# EAGLE board x50_ecu (EAGLE 9.2.2)
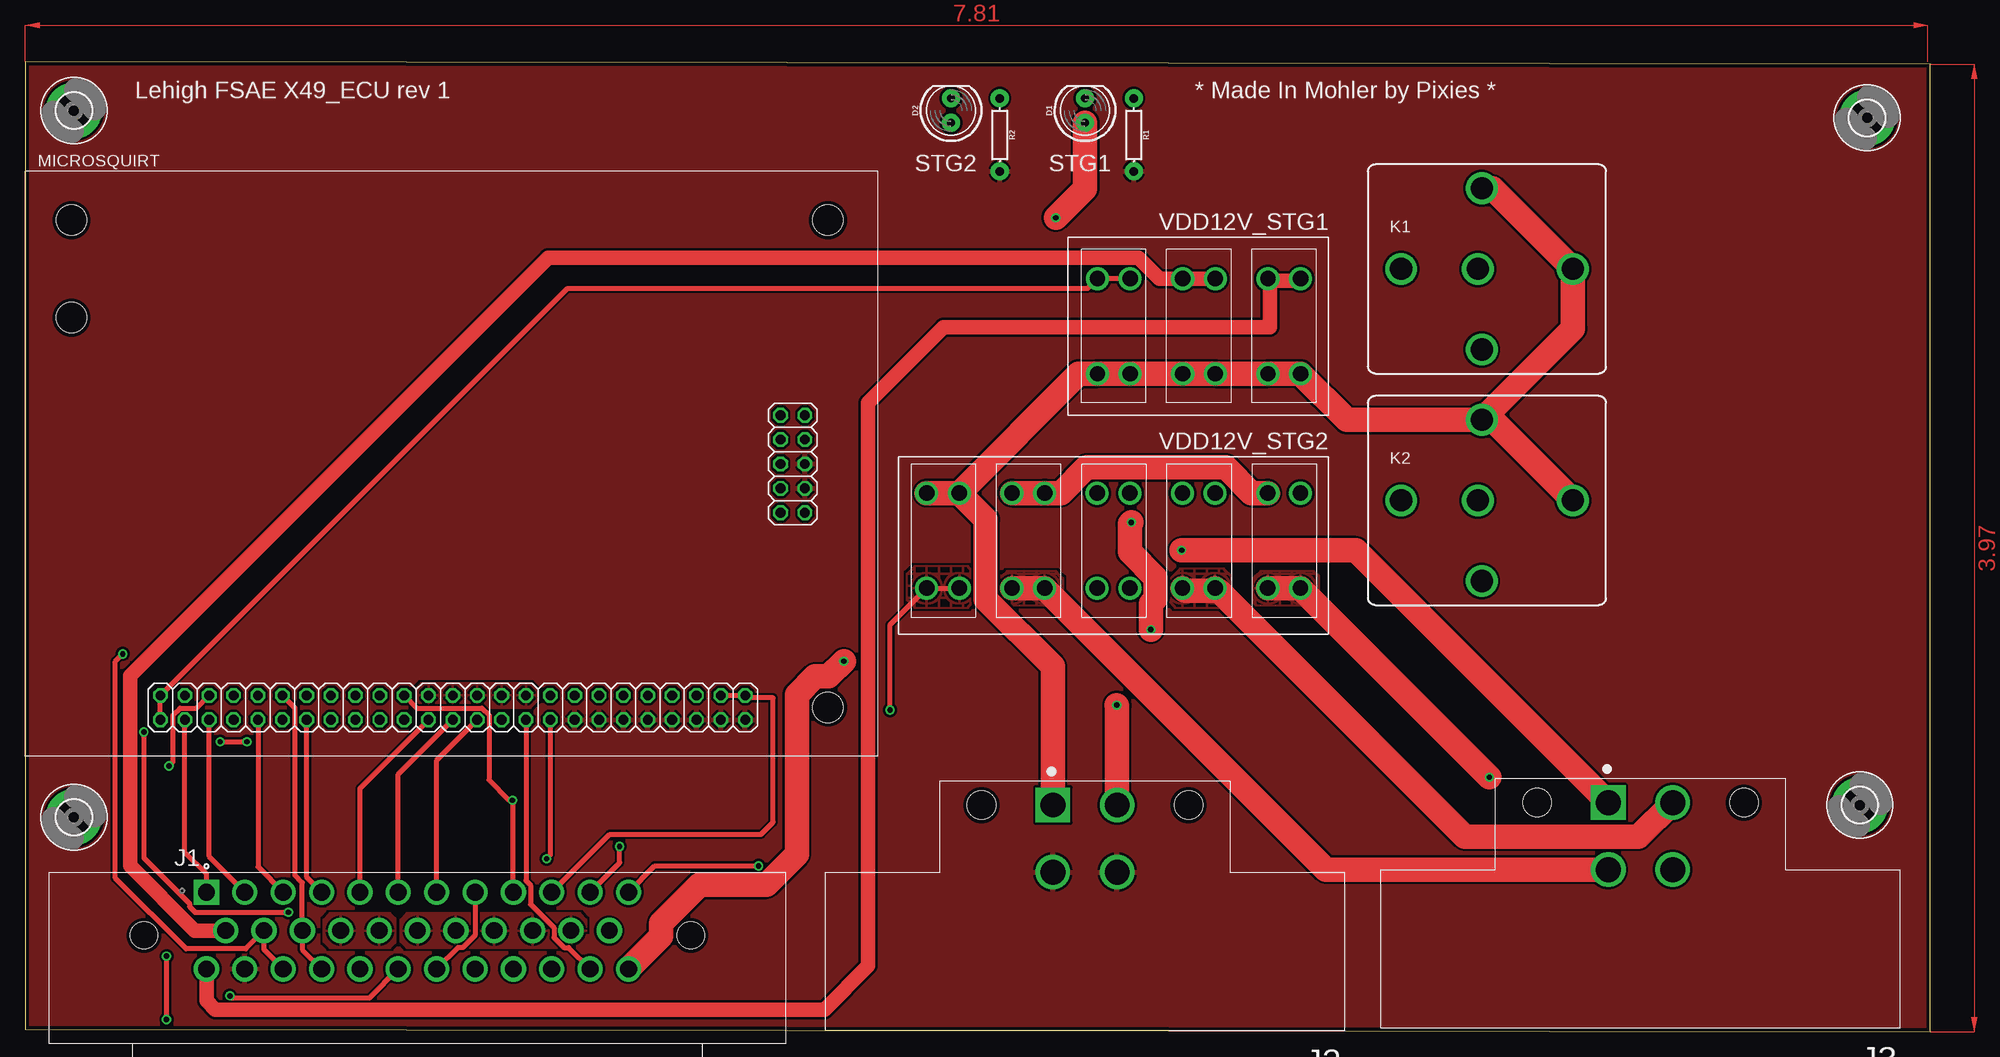
[diagram p0: board, top side]
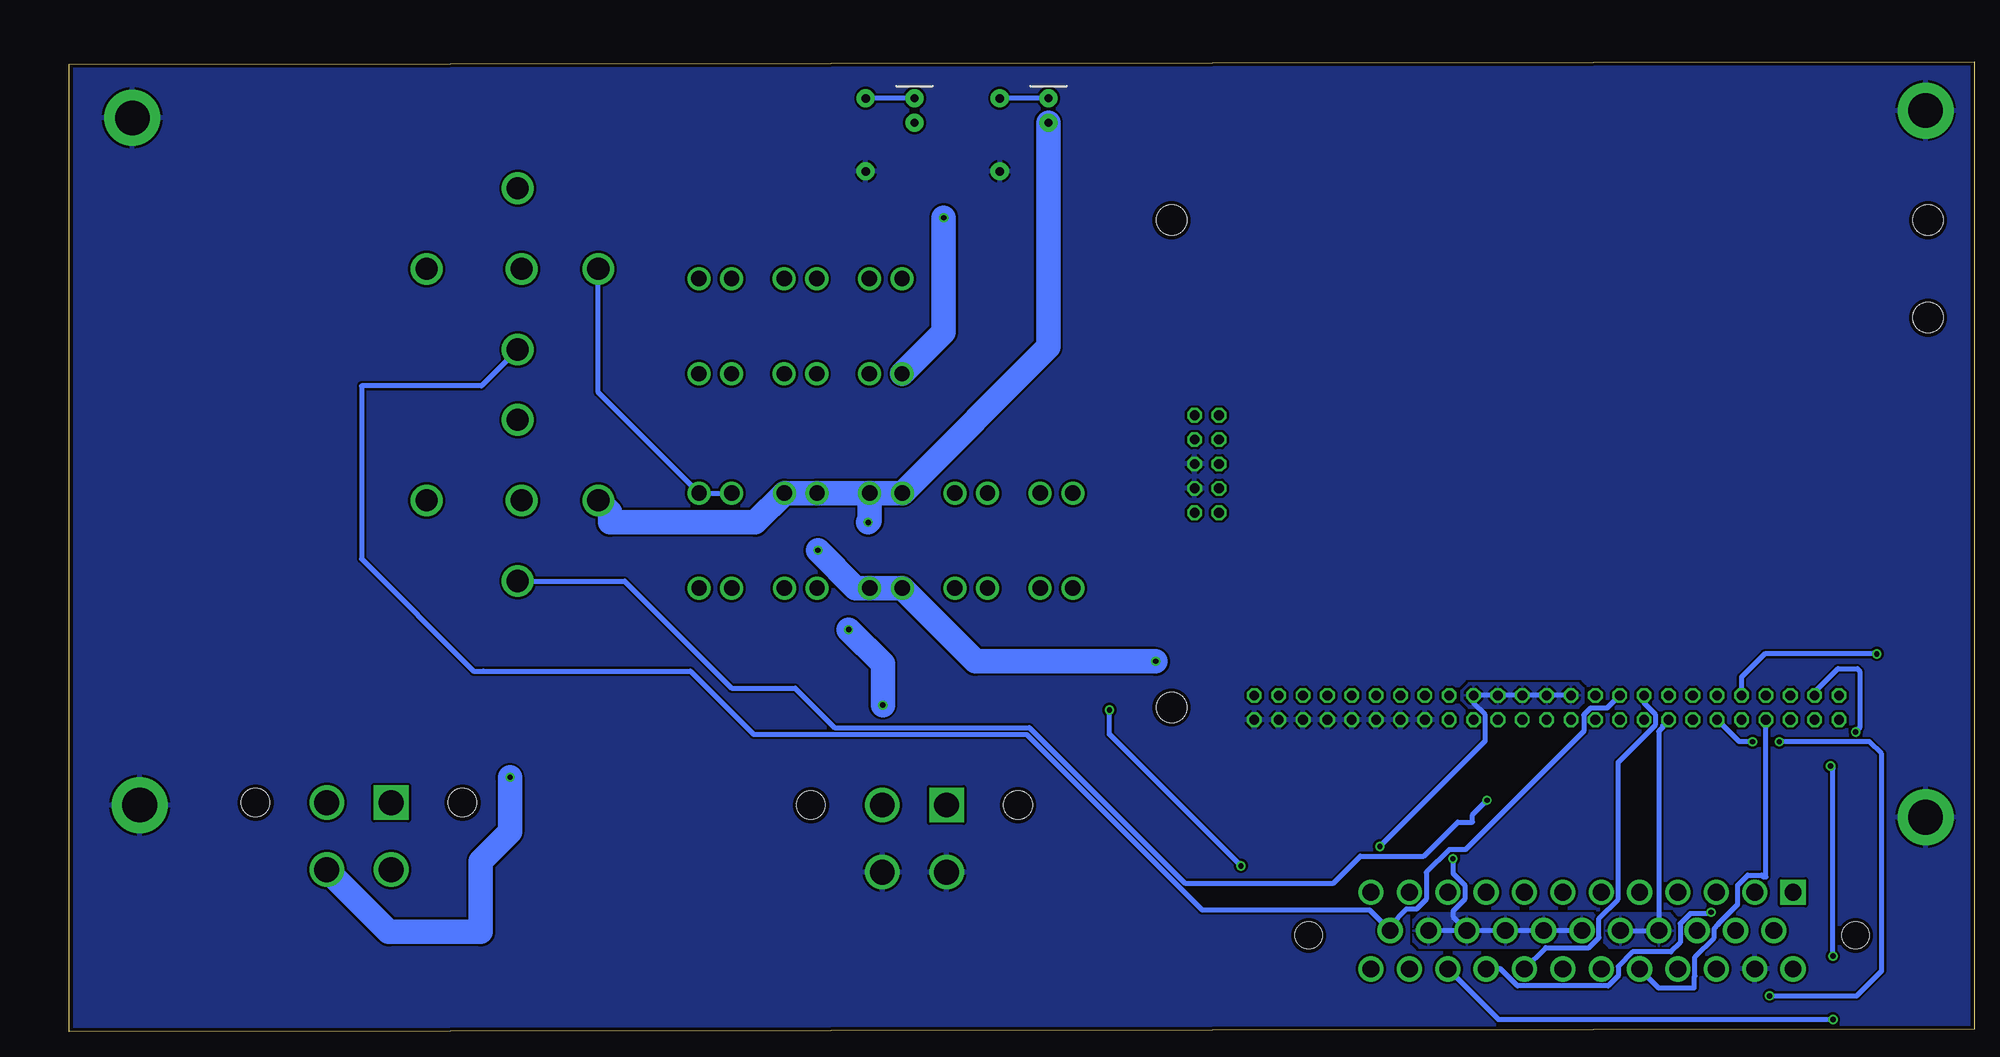
[diagram p1: board, bottom side, seen from below]

Size 198.63 x 101.09 mm. Coordinates in mm from the lower left corner, seen from the top.
Outline: 0,0.25 198.63,0 198.63,100.84 0,101.09 0,0.25
Copper layers (1*16): Top 0.035559375mm / dielectric 1.501140625mm / Bottom 0.035559375mm
Design rules "typical_4pcb": minimum track width 10mil, minimum drill 15mil, track to track 6mil, track to pad 6mil, pad to pad 6mil, via to via 6mil, smd to smd 6mil, copper to edge 15mil, drill to drill 8mil, minimum pad ring 10mil, minimum via ring 8mil, stop-mask expansion 4mil, vias tented up to drill 0mil, thermal gap 10mil
Net classes: 0 default: clearance 0.205 mm; 1 PWR: width 0.508 mm, drill 0.55 mm, clearance 0.205 mm to class 0, clearance 0.205 mm

## Footprints (pad centres in the part's own frame; a part is rotated, then mirrored left to right if it is on the bottom)
LED_5MM = drill 0.813 pad 1.88: A -1.27,0; K 1.27,0
3,6-PAD = drill 3.6 pad 5.842: B3,6 0,0
TE_1-776163-4 = drill 1.75 square: 1 -22,4 | drill 1.75: 2 -18,4; 3 -14,4; 4 -10,4; 5 -6,4; 6 -2,4; 7 2,4; 8 6,4; 9 10,4; 10 14,4; 11 18,4; 12 22,4; 13 -20,0; 14 -16,0; 15 -12,0; 16 -8,0; 17 -4,0; 18 0,0; 19 4,0; 20 8,0; 21 12,0; 22 16,0; 23 20,0; 24 -22,-4; 25 -18,-4; 26 -14,-4; 27 -10,-4; 28 -6,-4; 29 -2,-4; 30 2,-4; 31 6,-4; 32 10,-4; 33 14,-4; 34 18,-4; 35 22,-4 | hole 2.85: -28.5,-0.5; 28.5,-0.5
TE_DTP13-4P = drill 2.59 square: 1 3.355,0 | drill 2.59: 2 -3.355,0; 3 -3.355,6.99; 4 3.355,6.99 | hole 2.99: -10.795,0; 10.795,0
CB1 = drill 2.3: 30 8.95,0; 85 -0.55,-8.4; 86 -0.55,8.4; 87 -8.95,0; 87A -0.95,0
MICROSQUIRT_MODULE_V2.2M = drill 1.016 octagon: 5V_VREF_OUT 3.807,57.017; +12V_1 3.81,74.803; +12V_2 6.347,74.797; ACCEL_LED_OUT 3.807,67.177; ALT_CAM 33.009,10.152; ALT_INJ1 27.929,10.152; ALT_INJ2 30.469,10.152; BOOTLOADER 6.347,67.177; CANH 6.347,64.637; CANL 6.347,62.097; CLT_IN 3.807,69.717; FIDLE_OUT 6.347,51.937; FLEX 6.347,54.477; FUEL_PUMP_OUT 6.347,49.397; GND1_1 3.807,31.617; GND1_2 3.807,29.077; GND1_3 3.807,26.537; GND1_4 3.807,23.997; GND1_5 3.807,21.457; GND1_6 3.807,18.917; GND1_7 3.807,16.377; GND1_8 3.807,13.837; GND2_1 27.929,7.612; GND2_2 30.469,7.612; IAC_ENBL 35.549,10.152; IGN1_OUT_1 6.347,16.377; IGN1_OUT_2 6.347,13.837; IGN2_OUT_1 6.347,21.457; IGN2_OUT_2 6.347,18.917; INJ1_OUT_1 6.347,46.857; INJ1_OUT_2 6.347,44.317; INJ1_OUT_3 6.347,41.777; INJ1_OUT_4 6.347,39.237; INJ1_OUT_5 6.347,36.697; INJ2_OUT_1 6.347,34.157; INJ2_OUT_2 6.347,31.617; INJ2_OUT_3 6.347,29.077; INJ2_OUT_4 6.347,26.537; INJ2_OUT_5 6.347,23.997; MAP_IN 3.807,72.257; MAT_IN 3.807,64.637; O2_IN 3.807,41.777; OPTO_IN+ 3.807,51.937; OPTO_IN- 3.807,49.397; PA0 25.389,7.612; PE1 25.389,10.152; PT6 35.549,7.612; PT7 33.009,7.612; SENSOR_GND 3.807,34.157; SERIAL_GND 3.807,36.697; SERIAL_RX 6.347,72.257; SERIAL_TX 6.347,69.717; SPARE_ADC_1 3.807,54.477; SPARE_ADC_2 6.347,57.017; TACH_OUT 3.807,39.237; TPS_IN 3.807,59.557; VR1,2_GND 3.807,44.317; VR_IN1+ 3.807,46.857; VR_IN2+ 6.347,59.557; WARMLED_OUT 3.807,62.097 | hole 3.175: 5.08,5.207; 55.88,5.207; 45.72,84.074; 55.88,84.074
AXIAL-0.3 = drill 0.9 pad 1.88: P$1 -3.81,0; P$2 3.81,0
3568 = drill 1.6: L_1 0,0; L_2 0,3.404; R_1 9.906,0; R_2 9.906,3.404

## Placement (x,y rotation side)
D1  560  [LED_5MM]  110.49,96.01 90 top
D2  560  [LED_5MM]  96.52,96.01 90 top
H1  MOUNT-PAD-ROUND3.6  [3,6-PAD]  5.08,96.01 0 top
H2  MOUNT-PAD-ROUND3.6  [3,6-PAD]  192.02,95.25 0 top
H3  MOUNT-PAD-ROUND3.6  [3,6-PAD]  5.08,22.35 0 top
H4  MOUNT-PAD-ROUND3.6  [3,6-PAD]  191.26,23.62 0 top
J1  1-776163-4  [TE_1-776163-4]  40.89,10.54 0 top
J2  DTP13-4P  [TE_DTP13-4P]  110.49,23.62 180 top
J3  DTP13-4P  [TE_DTP13-4P]  168.4,23.88 180 top
K1  CB1-P-12V  [CB1]  152.4,79.5 0 top
K2  CB1-P-12V  [CB1]  152.4,55.37 0 top
MICROSQUIRT  MICROSQUIRT_MODULE_V2.2M  [MICROSQUIRT_MODULE_V2.2M]  88.9,28.7 90 top
R1  [AXIAL-0.3]  115.57,93.47 270 top
R2  [AXIAL-0.3]  101.6,93.47 270 top
U$2  3568  [3568]  132.97,68.58 90 top
U$3  3568  [3568]  124.08,68.58 90 top
U$4  3568  [3568]  115.19,68.58 90 top
U$5  3568  [3568]  93.98,56.13 270 top
U$6  3568  [3568]  120.65,56.13 270 top
U$7  3568  [3568]  111.76,56.13 270 top
U$8  3568  [3568]  102.87,56.13 270 top
U$9  3568  [3568]  129.54,56.13 270 top

## Library data of the parts
D1 D2 = SparkFun-LED
H1-H4 = holes
J1 = te_connectivity; COMPLIANCE: Lead free/RoHS compliant; CURRENT_RATING: Varies by Wire gauge; DATASHEET: http://www.te.com/commerce/DocumentDelivery/DDEController?Action=srchrtrv&DocNm=776163&DocType=Customer+Drawing&DocLang=English; FOOTPRINT: TE_1-776163-4; LATEST_REV_DATE: 09, March 2016; LIBRARY_REF: 1-776163-4.lbr; MANUFACTURER: TE Connectivity; PACKAGE: Panel Mount, Through Hole, Right angled; PART_DESCRIPTION: CONN HEADER 35POS R/A GOLD GRAY; PART_REV: J8; PITCH: 4mm; POS: 35; SPICEPREFIX: X; STANDARD: Manufacturer Recommendations; TE_PN: 1-776163-4; VOLTAGE_RATING: 250VAC
J2 J3 = te_connectivity; AVAILABILITY: In stock; DESCRIPTION: Dtp Recp 4#12 Pin 90 Deg; MF: TE Connectivity; MPN: DTP13-4P; PARTREV: B1; STANDARD: Manufacturer recommendation
K1 K2 = relay; MF: AROMAT/ MATSUSHITA; MPN: CB1-P-12V; OC_FARNELL: unknown; OC_NEWARK: 52F9201
MICROSQUIRT = microsquirt
R1 R2 = SparkFun-Resistors
U$2-U$9 = keystone_electronics

## Nets
ACCEL_LED: J1.28 MICROSQUIRT.ACCEL_LED_OUT
CAN_H: J1.14 J1.26 MICROSQUIRT.CANH
CAN_L: J1.15 J1.27 MICROSQUIRT.CANL
CLT_IN: J1.2 MICROSQUIRT.CLT_IN
FAN_EN_OUT: J1.23 K1.85 MICROSQUIRT.FIDLE_OUT
FLEX: J1.31 MICROSQUIRT.FLEX
GND: H1.B3,6 H2.B3,6 H3.B3,6 H4.B3,6 J1.25 J2.3 J2.4 MICROSQUIRT.GND1_1 MICROSQUIRT.GND1_2 MICROSQUIRT.GND1_3 MICROSQUIRT.GND1_4 MICROSQUIRT.GND1_5 MICROSQUIRT.GND1_6 MICROSQUIRT.GND1_7 MICROSQUIRT.GND1_8 MICROSQUIRT.GND2_1 MICROSQUIRT.GND2_2 R1.P$2 R2.P$2
IGN1_OUT: J1.10 MICROSQUIRT.IGN1_OUT_1 MICROSQUIRT.IGN1_OUT_2
INJ1_OUT: J1.11 MICROSQUIRT.INJ1_OUT_1 MICROSQUIRT.INJ1_OUT_2 MICROSQUIRT.INJ1_OUT_3 MICROSQUIRT.INJ1_OUT_4 MICROSQUIRT.INJ1_OUT_5
MAP_IN: J1.1 MICROSQUIRT.MAP_IN
MAT_IN: J1.3 MICROSQUIRT.MAT_IN
N$1: D1.K R1.P$1
N$2: D2.K R2.P$1
NEUTRAL_IN: J1.8 J1.30
O2_IN: J1.7 MICROSQUIRT.O2_IN
SENSOR_GND: J1.18 J1.19 J1.20 J1.21 J1.22 MICROSQUIRT.SENSOR_GND
SERIAL_GND: J1.34 MICROSQUIRT.SERIAL_GND
SERIAL_RX: J1.32 MICROSQUIRT.SERIAL_RX
SERIAL_TX: J1.33 MICROSQUIRT.SERIAL_TX
STG2_EN_OUT: J1.9 K2.85 MICROSQUIRT.FUEL_PUMP_OUT
TPS_IN: J1.4 MICROSQUIRT.TPS_IN
VDD5V: J1.16 J1.17 MICROSQUIRT.5V_VREF_OUT
VDD12V_BRAKE_TRANSP [PWR]: J1.13 U$3.R_1 U$3.R_2
VDD12V_DASH [PWR]: J1.24 U$2.R_1 U$2.R_2
VDD12V_ECU: MICROSQUIRT.+12V_1 MICROSQUIRT.+12V_2 U$4.R_1 U$4.R_2
VDD12V_FAN [PWR]: K1.87 U$8.L_1 U$8.L_2 U$9.L_1 U$9.L_2
VDD12V_FAN_L: J3.4 U$8.R_1 U$8.R_2
VDD12V_FAN_R: J3.3 U$9.R_1 U$9.R_2
VDD12V_FUEL_PUMP [PWR]: J3.2 U$6.R_1 U$6.R_2
VDD12V_IGN_INJ [PWR]: J1.35 J3.1 U$7.R_1 U$7.R_2
VDD12V_O2 [PWR]: J1.12 U$5.R_1 U$5.R_2
VDD12V_STG1 [PWR]: D1.A J2.1 K1.30 K1.86 K2.30 K2.86 U$2.L_1 U$2.L_2 U$3.L_1 U$3.L_2 U$4.L_1 U$4.L_2 U$5.L_1 U$5.L_2
VDD12V_STG2 [PWR]: D2.A J2.2 K2.87 U$6.L_1 U$6.L_2 U$7.L_1 U$7.L_2
VR+: J1.5 MICROSQUIRT.VR_IN1+
VR-: J1.6 MICROSQUIRT.VR1,2_GND
WARM_LED: J1.29 MICROSQUIRT.WARMLED_OUT

## Tracks (layer width: path | path; a pad name or v marks a point on that pad's centre or on a via)
ACCEL_LED
  Bottom 0.508: J1.28 32.92,4.57 29.21,4.57 29.21,5.72 29.12,5.81 29.12,7.81 27.12,9.81 27.12,10.72 26.67,11.18 26.67,11.27 24.67,13.27 24.67,15.27 23.63,16.31 22.16,16.31 21.97,16.12 21.72,16.12 MICROSQUIRT.ACCEL_LED_OUT
CAN_H  (via drill 0.55)
  Top 0.508: v10.16,39.37 9.4,38.61 9.4,16 16.76,8.64 22.99,8.64 J1.14 24.89,8.54 J1.26
  Bottom 0.508: v10.16,39.37 21.84,39.37 24.26,36.95 MICROSQUIRT.CANH
CAN_L
  Top 0.508: J1.27 28.89,8.54 J1.15 28.89,15.53 28.12,16.3 28.12,33.73 MICROSQUIRT.CANL
CLT_IN
  Top 0.508: J1.2 19.18,18.25 MICROSQUIRT.CLT_IN
FAN_EN_OUT
  Bottom 0.508: MICROSQUIRT.FIDLE_OUT 38.28,33.73 40.01,33.73 40.72,33.02 40.72,31.29 53.04,18.97 54.74,18.97 57.12,16.59 57.12,13.81 58.16,12.77 59.24,12.77 60.89,11.12 J1.23 63.05,12.7 80.52,12.7 98.81,30.99 126.49,30.99 127.25,30.99 133.86,37.59 155.45,37.59 156.46,37.59 168.15,49.28 168.15,67.31 155.64,67.31 K1.85
FLEX
  Bottom 0.508: J1.31 44.67,8.77 40.16,8.77 39.12,9.81 39.12,11.81 37.12,13.81 37.12,28.08 33.2,32 33.2,33.02 34.42,34.24 MICROSQUIRT.FLEX
GND
  pour Top (isolate 0.254, rank 2): -1.27,102.36 200.15,102.36 200.15,-1.78 -1.27,-1.78
  pour Bottom (isolate 0.254, rank 2): -1.27,102.36 200.15,102.36 200.15,-1.78 -1.27,-1.78
IGN1_OUT
  Top 0.508: J1.10 60.93,20.57 76.71,20.57 77.98,21.84 77.98,34.8 75.31,34.8 MICROSQUIRT.IGN1_OUT_2 MICROSQUIRT.IGN1_OUT_1
INJ1_OUT  (via drill 0.55)
  Top 0.508: J1.11 61.98,17.62 v61.98,19.3
  Bottom 0.508: v61.98,19.3 50.98,30.3 50.98,33.02 52.2,34.24 MICROSQUIRT.INJ1_OUT_5 MICROSQUIRT.INJ1_OUT_4 MICROSQUIRT.INJ1_OUT_3 MICROSQUIRT.INJ1_OUT_2 MICROSQUIRT.INJ1_OUT_1
  pour Bottom: 40.77,34.29 40.77,35.81 41.27,36.32 52.7,36.32 53.47,35.56 53.47,34.54 52.7,33.78 41.27,33.78
  pour Top: 53.47,35.56 53.47,34.54 52.7,33.78 41.27,33.78 40.77,34.29 40.77,35.81 41.27,36.32 52.7,36.32
MAP_IN
  Top 0.508: J1.1 18.89,16.41 16.64,18.66 MICROSQUIRT.MAP_IN
MAT_IN
  Top 0.508: J1.3 24.26,17.17 MICROSQUIRT.MAT_IN
N$1
  Bottom 0.508: D1.K R1.P$1
N$2
  Bottom 0.508: D2.K R2.P$1
NEUTRAL_IN
  Top 0.508: J1.30 45.12,8.77 45.63,8.77 46.89,10.04 J1.8
O2_IN
  Top 0.508: J1.7 42.89,28.28 MICROSQUIRT.O2_IN
SENSOR_GND  (via drill 0.55)
  Top 0.508: MICROSQUIRT.SENSOR_GND 54.74,18.42 v54.36,18.03
  Bottom 0.508: J1.21 54.36,12 54.36,12.57 53.12,13.81 53.12,15.27 54.36,16.51 v54.36,18.03 | J1.18 J1.19 J1.20 J1.21 | J1.21 J1.22
  pour Top: 39.75,12.32 57.85,12.32 58.48,11.68 58.48,9.4 57.85,8.76 39.75,8.76 39.12,9.4 39.12,11.68
  pour Bottom: 39.75,12.32 57.85,12.32 58.48,11.68 58.48,9.4 57.85,8.76 39.75,8.76 39.12,9.4 39.12,11.68
SERIAL_GND
  Top 0.508: MICROSQUIRT.SERIAL_GND 52.2,15.74 52.67,15.27 52.67,13.27 55.12,10.82 55.12,9.81 56.16,8.77 56.67,8.77 J1.34
SERIAL_RX  (via drill 0.55)
  Top 0.508: v12.37,31.24 12.37,18.11 17.12,13.36 17.12,13.04 17.71,12.45 v27.43,12.45
  Bottom 0.508: MICROSQUIRT.SERIAL_RX 16.64,35.43 14.22,37.85 12.19,37.85 11.94,37.59 11.94,31.67 v12.37,31.24 | v27.43,12.45 27.57,12.31 29.63,12.31 30.67,11.27 30.67,9.27 31.63,8.31 35.63,8.31 37.12,6.82 37.12,5.81 38.16,4.77 47.63,4.77 49.4,6.54 J1.32
SERIAL_TX  (via drill 0.55)
  Top 0.508: v14.99,27.69 15.42,28.12 15.42,33.02 16.14,33.73 17.86,33.73 MICROSQUIRT.SERIAL_TX | v14.73,1.27 v14.73,7.87
  Bottom 0.508: J1.33 49.62,1.27 v14.73,1.27 | v14.73,7.87 14.73,27.43 v14.99,27.69
STG2_EN_OUT  (via drill 0.55)
  Top 0.508: J1.9 50.8,14.64 v50.8,24.13 50.42,24.13 48.34,26.21 48.34,33.02 47.63,33.73 40.82,33.73 MICROSQUIRT.FUEL_PUMP_OUT
  Bottom 0.508: K2.85 140.7,46.97 129.54,35.81 122.94,35.81 118.82,31.7 98.51,31.7 82.3,15.49 66.8,15.49 64.01,18.29 57.4,18.29 53.85,21.84 52.32,21.84 52.32,22.61 v50.8,24.13
TPS_IN
  Top 0.508: J1.4 29.34,16.09 MICROSQUIRT.TPS_IN
VDD5V
  Bottom 0.508: MICROSQUIRT.5V_VREF_OUT 32.49,31.9 32.49,31.71 32.89,31.3 J1.16 J1.17
  pour Top: 31.75,12.32 38.04,12.32 38.54,11.81 38.54,9.27 38.04,8.76 31.75,8.76 31.11,9.4 31.11,11.68
  pour Bottom: 31.75,12.32 38.04,12.32 38.54,11.81 38.54,9.27 38.04,8.76 31.75,8.76 31.11,9.4 31.11,11.68
VDD12V_BRAKE_TRANSP
  Top 1.524: J1.13 17.65,10.54 10.92,17.27 10.92,37.08 54.49,80.65 116.09,80.65 118.25,78.49 U$3.R_2 U$3.R_1
VDD12V_DASH
  Top 1.524: J1.24 18.89,3.2 19.81,2.29 83.31,2.29 87.88,6.86 87.88,65.53 95.76,73.41 129.79,73.41 129.79,78.26 | 129.79,78.26 U$2.R_2 | U$2.R_1 132.74,78.26 129.79,78.26
VDD12V_ECU
  Top 0.508: MICROSQUIRT.+12V_1 MICROSQUIRT.+12V_2 56.52,77.47 110.77,77.47 U$4.R_2 U$4.R_1
VDD12V_FAN
  Top 2.54: U$8.L_1 U$8.L_2 107.98,56.13 110.65,58.81 125.16,58.81 127.84,56.13 U$9.L_1
  Bottom 0.508: U$9.L_1 U$9.L_2 143.45,66.64 K1.87
VDD12V_FAN_L
  Top 2.54: J3.4 135.62,16.89 U$8.R_2 U$8.R_1
  pour Top (hatched): 102.36,48.01 107.44,48.01 107.7,47.75 108.2,47.24 108.2,46.99 108.2,44.7 107.95,44.45 107.44,44.45 102.36,44.45 101.85,44.45 101.35,44.96 101.35,47.5 101.85,47.5
VDD12V_FAN_R  (via drill 0.55)
  Top 2.54: v152.65,26.52 U$9.R_2 U$9.R_1
  Bottom 2.54: v152.65,26.52 152.65,20.83 155.7,17.78 155.7,10.41 165.28,10.41 J3.3
  pour Top (hatched): 129.03,48.01 128.78,48.01 128.27,47.5 128.02,47.24 128.02,44.7 128.27,44.45 129.29,44.45 134.11,44.45 134.87,45.21 134.87,47.5 134.62,47.75 134.37,48.01
VDD12V_FUEL_PUMP
  Top 2.54: U$6.R_1 120.9,45.97 124.31,45.97 | 124.31,45.97 124.46,45.97 150.11,20.32 168.2,20.32 J3.2 | 124.31,45.97 U$6.R_2
  pour Top (hatched): 120.4,48.26 124.97,48.26 125.73,47.5 125.73,44.96 124.97,44.2 119.89,44.2 119.13,44.96 119.13,46.99
VDD12V_IGN_INJ  (via drill 0.55)
  Top 2.54: J1.35 66.32,9.96 66.32,11.32 70.32,15.32 77.26,15.32 80.45,18.51 80.45,35.12 82.35,37.02 83.76,37.02 v85.34,38.61 | J3.1 138.75,50.17 v120.56,50.17
  Bottom 2.54: v85.34,38.61 104.14,38.61 U$7.R_1 U$7.R_2 116.61,46.23 v120.56,50.17
VDD12V_O2  (via drill 0.55)
  Top 0.508: J1.12 65.62,17.27 v76.45,17.27 | v90.17,33.53 90.17,42.42 U$5.R_1 U$5.R_2
  Bottom 0.508: v76.45,17.27 90.17,30.99 v90.17,33.53
  pour Top (hatched): 94.23,48.51 98.3,48.51 99.06,47.75 99.06,44.96 98.3,44.2 93.47,44.2 92.71,44.2 92.46,44.45 91.95,44.96 91.95,47.75 92.71,48.51
VDD12V_STG1  (via drill 0.55)
  Top 0.508: 152.95,63.77 K2.86 | 152.95,87.9 K1.86
  Top 2.54: J2.1 107.14,38.08 100.12,45.09 100.12,53.39 U$5.L_2 | U$5.L_2 U$5.L_1 | D1.A 110.49,87.88 v107.44,84.84 | K2.30 152.95,63.77 | 152.95,87.9 K1.30 161.35,73.27 K2.86 137.78,63.77 U$2.L_1 U$2.L_2 U$3.L_1 U$3.L_2 U$4.L_1 U$4.L_2 109.83,68.58 U$5.L_2
  Bottom 2.54: v107.44,84.84 107.44,72.92 U$4.L_2
VDD12V_STG2  (via drill 0.55)
  Top 2.54: J2.2 113.84,33.98 v113.79,34.04 | v117.35,41.91 117.35,44.63 117.84,45.12 117.84,47.34 115.16,50.01 115.16,52.93 v115.32,53.09
  Bottom 2.54: D2.A 96.52,71.37 U$7.L_1 U$7.L_2 | v113.79,34.04 113.79,38.35 v117.35,41.91 | K2.87 142.24,54.16 142.24,53.09 127.1,53.09 U$6.L_2 U$6.L_1 U$7.L_2 | U$7.L_2 115.16,53.24 v115.32,53.09
VR+
  Top 0.508: J1.5 34.89,25.36 MICROSQUIRT.VR_IN1+
VR-
  Top 0.508: J1.6 38.89,26.82 MICROSQUIRT.VR1,2_GND
WARM_LED  (via drill 0.55)
  Top 0.508: J1.29 35.86,3.51 21.34,3.51 v21.34,3.73 | v20.32,30.23 v23.11,30.23
  Bottom 0.508: v21.34,3.73 12.27,3.73 9.65,6.35 9.65,28.96 10.92,30.23 v20.32,30.23 | v23.11,30.23 24.52,30.23 MICROSQUIRT.WARMLED_OUT
(copper drawn outside any net)
  shapes: Top area x2

## Text on the board
tPlace: Lehigh FSAE X49_ECU rev 1 | * Made In Mohler by Pixies * | STG2 | STG1 | VDD12V_STG1 | VDD12V_STG2